# Altium PCB IR2101+irfz44.PcbDoc
Units mm, origin at the board's own origin, x right, y up, seen from the top; angles counter-clockwise.
Board outline 66.04 x 105.41 mm, 2 copper layers (Top Layer, Bottom Layer); 55 components, 31 nets, 156 pads, 33 vias.
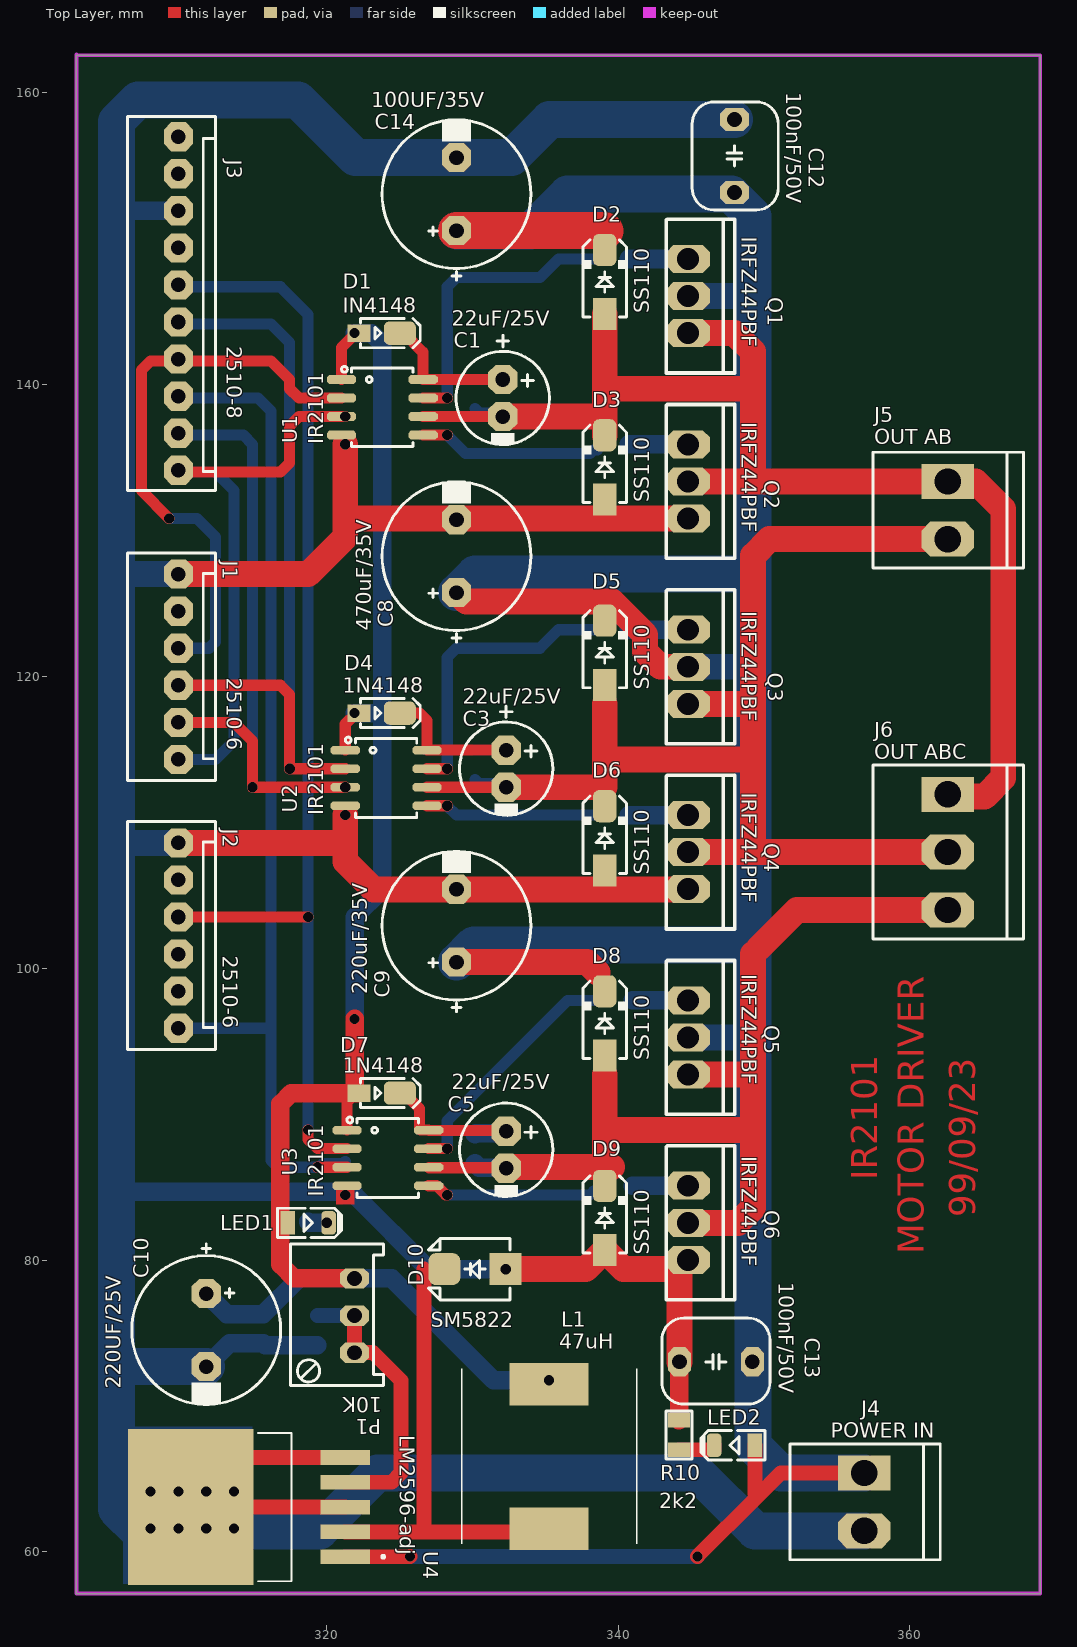
[diagram p0: Top Layer view]
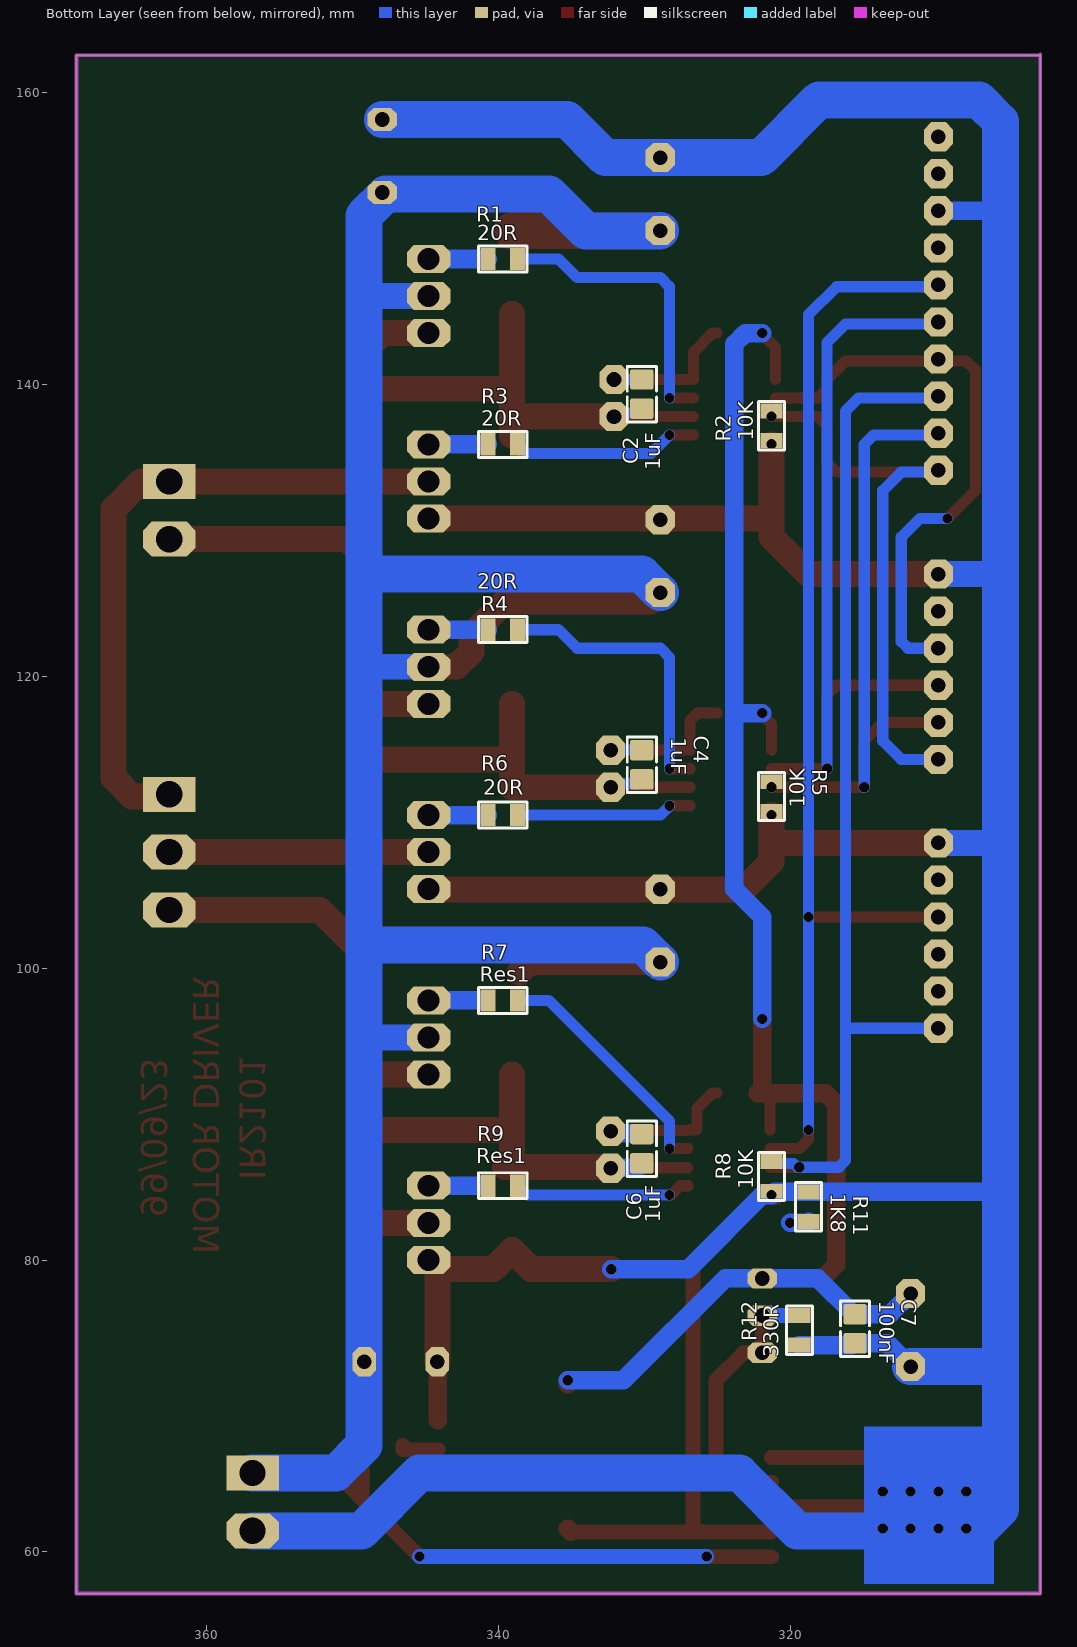
[diagram p1: Bottom Layer view, seen from below]
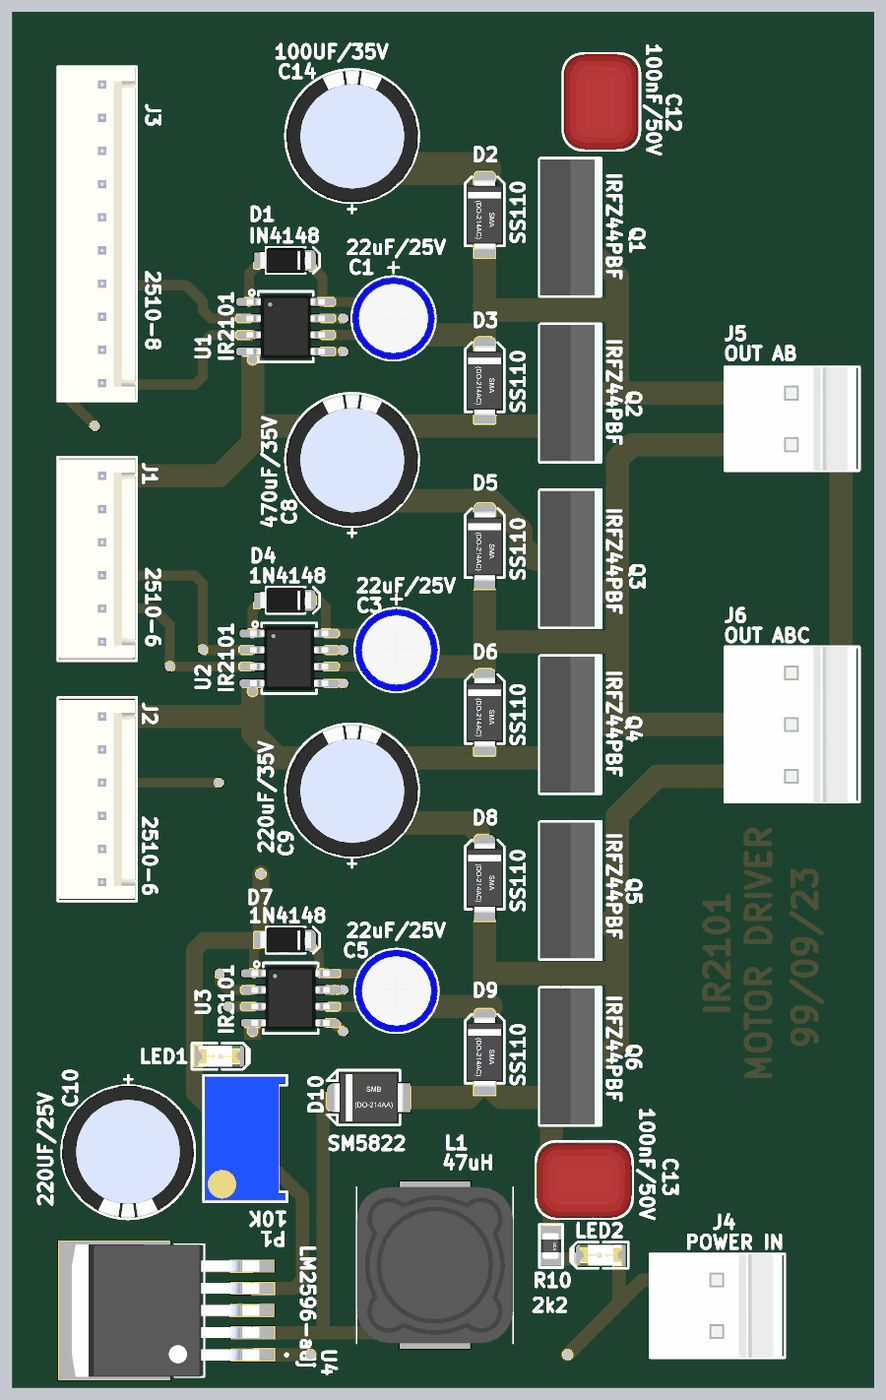
[diagram p2: 3D render of the assembled board from above, using the file's embedded part models]
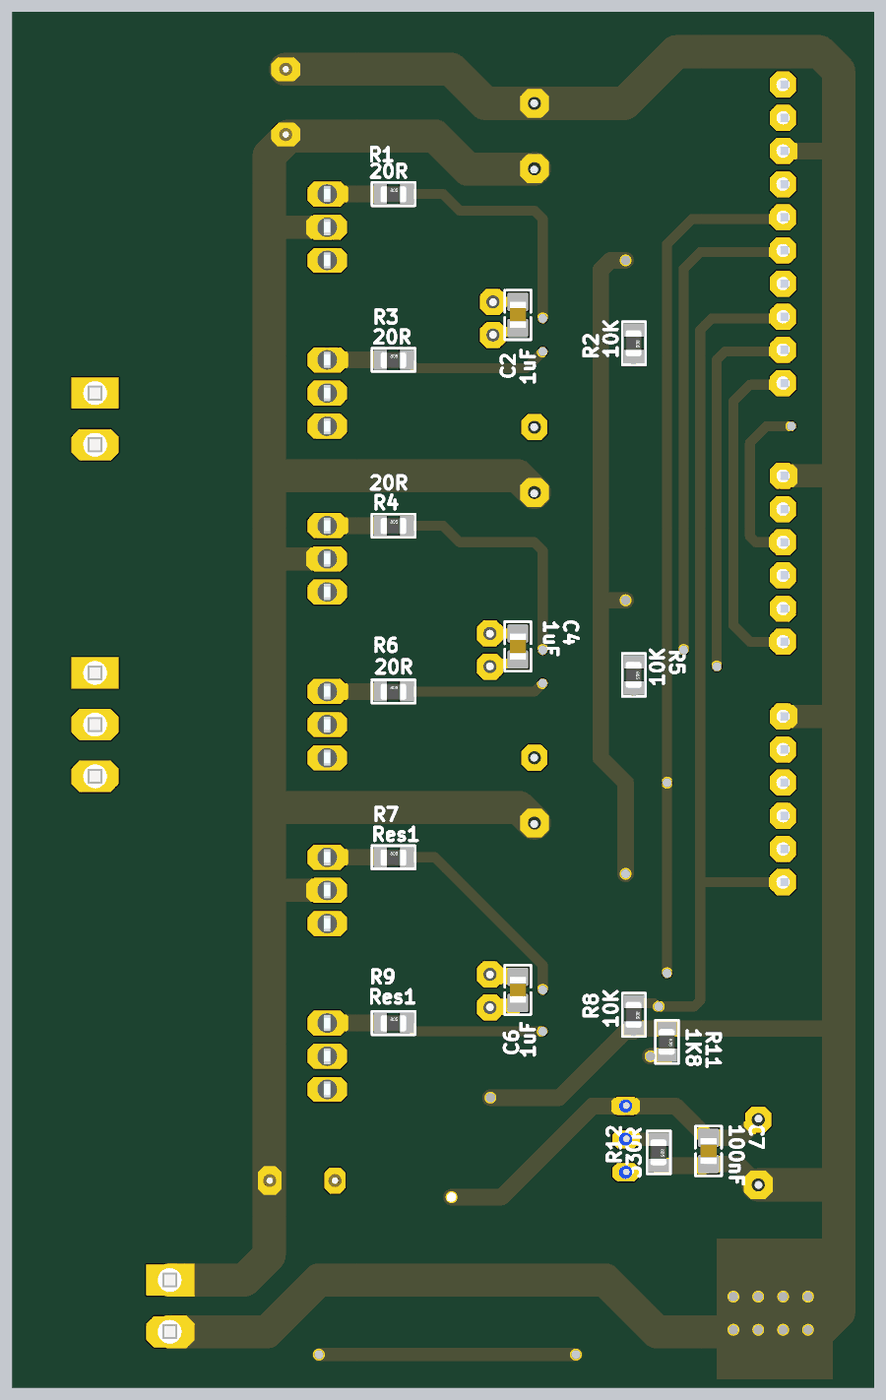
[diagram p3: 3D render of the assembled board from below, using the file's embedded part models]

## Layer stack, top to bottom
Top Solder: solder mask 0.0102, Solder Resist, Dk 3.5
Top Layer: signal copper 0.0356
Dielectric 1: dielectric 0.32, FR-4, Dk 4.8
Bottom Layer: signal copper 0.0356
Bottom Solder: solder mask 0.0102, Solder Resist, Dk 3.5

## Board outline
302.895,57.15 302.895,162.56 368.935,162.56 368.935,57.15

## Design rules (kind name [scope] priority, off if disabled: settings)
Clearance [All] p1: gap=0.254 ignorepadtopadclearanceinfootprint=FALSE except(0: Arc-Hole Track-Hole SMDPad-Hole THPad-Hole Via-Hole Fill-Hole Poly-Hole Region-Hole Text-Hole)
PolygonConnect [All] p1: connectstyle=Relief reliefconductorwidth=0.254 reliefentries=4 polygonreliefangle="90 Angle" airgapwidth=0.254
RoutingVias [All] p1: holewidth=0.711 width=1.27 viastyle="Through Hole" minholewidth=0.711 minwidth=1.27 maxholewidth=0.711 maxwidth=1.27
SolderMaskExpansion [All] p1: expansion=0.102 istentingtop=FALSE
Width [All] p1: maxlimit=2.54 minlimit=0.508 preferedwidth=1.27 minimp=50.000000 maximp=50.000000 favimp=50.000000
30 further rules are at their usual default settings.

## Components (designator, comment, footprint, x,y, rotation, side; value= is the part's Value field where it differs from the comment)
C1 "22uF/25V" C_EL_6X11 332.105,139.065 r270 top value=22uF
C2 "1uF" C0805E 330.2,139.335 r270 bottom
C3 "22uF/25V" C_EL_6X11 332.336,113.665 r270 top value=22uF
C4 "1uF" C0805E 330.2,113.935 r270 bottom
C5 "22uF/25V" C_EL_6X11 332.336,87.554 r270 top value=22uF
C6 "1uF" C0805E 330.2,87.63 r270 bottom
C7 "100nF" C0805E 315.595,75.295 r90 bottom
C8 "470uF/35V" C_EL_10X12 328.93,128.23 r90 top
C9 "220uF/35V" C_EL_10X12 328.93,102.91 r90 top
C10 "220UF/25V" C_EL_10X12 311.785,75.196 r270 top
C12 "100nF/50V" C_PLY_7X6 347.98,155.649 r270 top
C13 "100nF/50V" C_PLY_7X6 346.71,73.025 r0 top value=10nF
C14 "100UF/35V" C_EL_10X12 328.93,153.035 r90 top
D1 "IN4148" D_SOD123W 323.85,143.51 r0 top value=?
D2 "SS110" D_SMA 339.09,147.01 r90 top value=?
D3 "SS110" D_SMA 339.09,134.31 r90 top value=?
D4 "1N4148" D_SOD123W 323.85,117.475 r0 top value=?
D5 "SS110" D_SMA 339.09,121.61 r90 top value=?
D6 "SS110" D_SMA 339.09,108.895 r90 top value=?
D7 "1N4148" D_SOD123W 323.85,91.44 r0 top value=?
D8 "SS110" D_SMA 339.09,96.21 r90 top value=?
D9 "SS110" D_SMA 339.09,82.875 r90 top value=?
D10 "SM5822" D_SMB 330.2,79.375 r180 top value=?
J1 "2510-6" 6p-2510 309.88,120.65 r90 top value="INPUT AB"
J2 "2510-6" 6p-2510 309.88,102.235 r90 top value="INPUT C"
J3 "2510-8" 10p-2510 309.88,145.542 r90 top value="INPUT ABC"
J4 "POWER IN" CH-02 356.87,63.425 r270 top
J5 "OUT AB" CH-02 362.585,131.37 r270 top
J6 "OUT ABC" CH-03 362.585,107.95 r270 top
L1 "47uH" CDRH127LDNP560MC-12*12 335.28,61.595 r0 top
LED1 "LED3mm" LED1206RED 318.77,82.55 r0 top
LED2 "LED3mm" LED1206RED 347.98,67.31 r180 top
P1 "10K" POT_3296W 321.945,76.196 r90 top
Q1 "IRFZ44PBF" TO-254 344.805,148.59 r270 top
Q2 "IRFZ44PBF" TO-254 344.805,135.89 r270 top
Q3 "IRFZ44PBF" TO-254 344.805,123.19 r270 top
Q4 "IRFZ44PBF" TO-254 344.805,110.49 r270 top
Q5 "IRFZ44PBF" TO-254 344.805,97.79 r270 top
Q6 "IRFZ44PBF" TO-254 344.805,85.09 r270 top
R1 "20R" R0805 339.725,148.59 r270 bottom
R2 "10K" R0805 321.31,137.16 r0 bottom
R3 "20R" R0805 339.725,135.89 r270 bottom
R4 "20R" R0805 339.725,123.19 r270 bottom
R5 "10K" R0805 321.31,111.76 r0 bottom
R6 "20R" R0805 339.725,110.49 r270 bottom
R7 "Res1" R0805 339.725,97.79 r270 bottom value=20R
R8 "10K" R0805 321.31,85.725 r0 bottom
R9 "Res1" R0805 339.725,85.09 r270 bottom value=20R
R10 "2k2" R0805 344.17,68.018 r180 top
R11 "1K8" R0805 318.77,83.65 r0 bottom
R12 "330R" R0805 319.405,75.184 r0 bottom
U1 "IR2101" SO_8 323.85,138.43 r0 top
U2 "IR2101" SO_8 324.11,113.03 r0 top
U3 "IR2101" SO_8 324.225,86.995 r0 top
U4 "LM2596-adj" "to-263-5 5d2pak LM2596S" 310.71,63.07 r180 top

## Footprints (in the part's own frame and the unit in brackets; to place one, negate y for a bottom-side part, rotate by r counter-clockwise, add the part's x,y. Pads: shape width x height; smd on the part's side, far side on the other; paste and mask are expansions set on the pad)
6p-2510 [mm] "DS1070  WF, Cvilux CI31 pitch 2.54mm"
  oct 2x2 hole 1: 1(-6.35,0) 2(-3.81,0) 3(-1.27,0) 4(1.27,0) 5(3.81,0) 6(6.35,0)
  silkscreen extent -7.8,-2.55 7.8,3.5, body extent -7.62,-2.4 7.62,3.4, height 11.56
10p-2510 [mm] "DS1070  WF, Cvilux CI31 pitch 2.54mm"
  oct 2x2 hole 1: 1(-11.43,0) 2(-8.89,0) 3(-6.35,0) 4(-3.81,0) 5(-1.27,0) 6(1.27,0) 7(3.81,0) 8(6.35,0) 9(8.89,0) 10(11.43,0)
  silkscreen extent -12.8,-2.55 12.8,3.5, body extent -12.7,-2.4 12.7,3.4, height 11.56
C0805E [mm] "CHIP Capacitor, 2.0X1.3mm, 0805, EXPANDED PAD"
  rrect20% 1.4x1.6 smd mask+0.1: 1(-1,0) 2(1,0)
  Top Layer pour cut-out: -0.5,0.8 0.5,0.8 0.5,-0.8 -0.5,-0.8
  silkscreen extent -1.9,-1 1.9,1, body extent -1,-0.63 1,0.62, height 1
C_EL_6X11 [mm] "Cap Elec, D6.3X11.0H pitch: 2.5mm"
  oct 2x2 hole 1: 1(-1.27,0) 2(1.27,0)
  silkscreen extent -4.3,-3.2 3.2,3.2, body extent -3.17,-3.18 3.18,3.18, height 2.51
C_EL_10X12 [mm] "Cap Elec, D10.0X12.0H pitch: 5.0mm"
  oct 2x2 hole 1: 1(-2.5,0) 2(2.5,0)
  silkscreen extent -5.9,-5.1 5.1,5.1, body extent -5.07,-5.08 5.05,5.04, height 13.7
C_PLY_7X6 [mm] "CAP, POLYESTER, 7.0X6.0mm pitch: 5.0mm"
  oct 1.6x2 hole 1: 1(-2.5,0) 2(2.5,0)
  silkscreen extent -3.7,-2.9 3.7,3, body extent -3.65,-2.85 3.65,2.85, height 8.3
CDRH127LDNP560MC-12*12 [mm]
  rect 5.4x2.9 smd: 1(0,0) 2(0,9.9)
  silkscreen extent -6,-1.05 6,10.95, body extent -6,-1.05 6,10.95, height 7.8
CH-02 [mm] "Connector; Header; 2 Position"
  rect 2.4x3.6 hole 1.8: 1(-1.98,0)
  oct 2.4x3.6 hole 1.8: 2(1.98,0)
  silkscreen extent -3.98,-5.1 3.96,5.21, body extent -3.96,-5 3.96,5, height 13.5
CH-03 [mm] "Connector; Header; 3 Position"
  rect 2.4x3.6 hole 1.8: 1(-3.96,0)
  oct 2.4x3.6 hole 1.8: 2(0,0) 3(3.96,0)
  silkscreen extent -5.96,-5.1 5.94,5.21, body extent -5.94,-5 5.94,5, height 13.5
D_SMA [mm] "SMA Molded Diode, 2-Leads, Body 4.3x2.7mm, SOD-128"
  rect 2.2x1.6 smd: 1(-2.2,0)
  rrect50% 2.2x1.6 smd: 2(2.2,0)
  silkscreen extent -2.4,-1.5 2.9,1.5, body extent -2.75,-1.4 2.75,1.4, height 2.6
D_SMB [mm] "SMB Molded Diode, 2-Leads, Body 4.3x3.5mm"
  rect 2.2x2.2 smd: 1(-2.1,0)
  rrect50% 2.2x2.2 smd: 2(2.1,0)
  Top Layer pour cut-out: -1.524,2.1 -1.524,-2.1 1.524,-2.1 1.524,2.1
  silkscreen extent -2.4,-2.1 3.2,2.1, body extent -2.75,-1.95 2.75,1.95, height 2.45
D_SOD123W [mm] "PowerDI-123, SOD123, DO-213AA, 1206D"
  rect 1.6x1.2 smd mask+0.1: 1(-1.6,0)
  rrect50% 2.2x1.6 smd mask+0.1: 2(1.2,0)
  Top Layer pour cut-out: -1.016,1.1 -1.016,-1.1 1.016,-1.1 1.016,1.1
  silkscreen extent -1.5,-1 2.6,1, body extent -1.95,-0.97 1.95,0.96, height 1
LED1206RED [mm] "LED, 1206, RED"
  rect 1x1.6 smd mask+0.075: 1(-1.4,0)
  rrect50% 1x1.6 smd mask+0.075: 2(1.4,0)
  Top Layer pour cut-out: -1.1,1.1 -1.1,-1.1 1.1,-1.1 1.1,1.1
  silkscreen extent -2.1,-1 2.3,1, body extent -1.6,-0.8 1.6,0.8, height 0.68
POT_3296W [mm] "POT, TRIM, 10.0X5.0mm, pitch: 2.5mm 3299W 3296W S64W"
  oct 1.4x2 hole 1: 1(-2.54,0) 2(0,0) 3(2.54,0)
  silkscreen extent -4.8,-2 4.9,4.4, body extent -4.73,-1.85 4.8,4.25, height 11.56
R0805 [mil]
  rect 60x40 smd: 1(0,40) 2(0,-40)
  silkscreen extent -35,-65 35,65, body extent -24,-39 26,39, height 31
SO_8 [mm] "SOP-8, 5x3.9mm body 1.27mm pitch, SOT96-1, M08A, S8, SOIC8, VO8, MS-012AA(JEDEC), R-8, 8S2, VOG8"
  oct 2x0.6 smd: 1(-2.8,1.905) 2(-2.8,0.635) 3(-2.8,-0.635) 4(-2.8,-1.905) 5(2.8,-1.905) 6(2.8,-0.635) 7(2.8,0.635) 8(2.8,1.905)
  silkscreen extent -2.8,-2.7 2.1,2.8, body extent -3,-2.45 3,2.45, height 1.7
TO-254 [mm]
  oct 1.92x3 hole 1.5: 1(0,0) 2(2.54,0) 3(5.08,0)
  silkscreen extent -2.73,-1.5 7.81,3.19, body extent -2.67,-1.5 7.75,3.19, height 18.84
"to-263-5 5d2pak LM2596S" [mm]
  rect 3.4x1 smd paste-3 mask+0: 1(-10.6,3.4) 2(-10.6,1.7) 3(-10.6,0) 4(-10.6,-1.7) 5(-10.6,-3.4)
  rect 8.6x10.7 smd paste-6 mask+0: 6(0,0)
  silkscreen extent -13.3,-5.08 -4.62,5.08, body extent -11.11,-5.08 3.24,5.08, height 4.65

## Part data
C1 C3 C5: library part "Cap Pol1", "Polarized Capacitor (Radial)", LatestRevisionDate=17-Jul-2002, LatestRevisionNote="Re-released for DXP Platform.", PackageDescription="Polarized Capacitor (Radial); 2 Leads", PackageReference=RB7.6-15, Published=8-Jun-2000, Publisher="Altium Limited"
C2 C4 C6: library part Cap, "Capacitor", LatestRevisionDate=17-Jul-2002, LatestRevisionNote="Re-released for DXP Platform.", PackageDescription="Radial Cap, Thru-Hole; 2 Leads; 0.3 in Pin Spacing", PackageReference=RAD-0.3, Published=8-Jun-2000, Publisher="Altium Limited"
C7: library part C
C8 C9: library part "Cap 220uF", "63VDC"
C10 C14: library part CAP_ELECTRO_POLIMER
C12: library part "Cap 100nF"
C13: library part Cap, "63VDC", LatestRevisionDate=17-Jul-2002, LatestRevisionNote="Re-released for DXP Platform.", PackageDescription="Radial Cap, Thru-Hole; 2 Leads; 0.3 in Pin Spacing", PackageReference=RAD-0.3, Published=8-Jun-2000, Publisher="Altium Limited"
D1 D4 D7: library part DIODE, "DIODE, GENERAL PURPOSE, 50V/1A", ASSEMBLY=ASSEMBLY, DESC=DESCRIPTION, MANF=MANF, MANF_P#=1N4001, PARAM=50V, PARAM2=1A, Price=PRICE
D2 D3 D5 D6 D8 D9 D10: library part SCHOTTKY, "DIODE, SCHOTTKY, 40V, 1A", ASSEMBLY=ASSEMBLY, DESC=DESCRIPTION, MANF=DIODES, MANF_P#=1N5819HW-7-F, PARAM=40V, PARAM2=1A, Price=PRICE
J1 J2: library part HDRWF_6, "Header, WF, Pitch: 2.54mm"
J3: library part HDRWF_8, "Header, WF, Pitch: 2.54mm", DESC="INPUT ABC"
J4 J5: library part "sip 2", "CH-02 ST pitch 3.96mm, Single Row, Vertical, 2pin", Contact Resistance=20mOhm, Operating Temperature="-40 to +105degC", Part Number=61300211121, Rated Current=3A, Withstanding Voltage=500VAC, Working Voltage=250VAC, ComponentLink1Description=Manufacturer, ComponentLink1URL=http://www.we-online.de, ComponentLink2Description=Datasheet, ComponentLink2URL=https://katalog.we-online.de/em/datasheet/6130xx11121.pdf, Gender=Male, Mounting Technology=THT, Orientation=Vertical, Packaging="3.96mm CH-02 ST", Pitch=3.96mm, Published Date="June 2019", Publisher="Wurth Elektronik", Row Number=Single
  J4: Pin Number=2
J6: library part "sip 3", "CH-02 STpitch 3.96mm, Single Row, Vertical, 3pin", Contact Resistance=20mOhm, Operating Temperature="-40 to +105degC", Part Number=61300311121, Rated Current=3A, Withstanding Voltage=500VAC, Working Voltage=250VAC, ComponentLink1Description=Manufacturer, ComponentLink1URL=http://www.we-online.de, ComponentLink2Description=Datasheet, ComponentLink2URL=https://katalog.we-online.de/em/datasheet/6130xx11121.pdf, Gender=Male, Mounting Technology=THT, Orientation=Vertical, Packaging="3.96mm CH-02 ST", Pin Number=3, Pitch=1, Published Date="June 2019", Publisher="Wurth Elektronik", Row Number=Single
L1: library part CDRH127_LDNP-560MC, "Inductor", Arrow Part Number=CDRH127/LDNP-560MC, Manufacturer_Name=Sumida, Mouser Part Number=851-CDRH127LDNP560MC, Arrow Price/Stock=https://www.arrow.com/en/products/cdrh127ldnp-560mc/sumida, Datasheet Link=https://www.arrow.com/en/products/cdrh127ldnp-560mc/sumida, Height=8mm, Manufacturer_Part_Number=CDRH127/LDNP-560MC, Mouser Price/Stock=https://www.mouser.co.uk/ProductDetail/Sumida/CDRH127-LDNP-560MC?qs=IXCoV6m%252B579ap3iATSRauQ%3D%3D
P1: library part Multi-Turn, "Potentiometer"
Q1 Q2 Q3 Q4 Q5 Q6: "MOSFET (N-Channel)", Manufacturer_Name=Vishay, Mouser Part Number=844-IRFZ44PBF, Arrow Part Number=IRFZ44PBF, Arrow Price/Stock=https://www.arrow.com/en/products/irfz44pbf/vishay, Datasheet Link=https://www.vishay.com/docs/91291/91291.pdf, Height=4.65mm, Manufacturer_Part_Number=IRFZ44PBF, Mouser Price/Stock=https://www.mouser.co.uk/ProductDetail/Vishay-Semiconductors/IRFZ44PBF?qs=%2FRKvNCQzLu0R%252BpFoqVUQ5w%3D%3D
R1 R2 R3 R4 R5 R6 R8 R12: library part Res1, "Resistor", LatestRevisionDate=17-Jul-2002, LatestRevisionNote="Re-released for DXP Platform.", PackageDescription="Axial Device, Thru-Hole; 2 Leads; 0.3 in Pin Spacing", PackageReference=AXIAL-0.3, Published=8-Jun-2000, Publisher="Altium Limited"
R7 R9: "Resistor", LatestRevisionDate=17-Jul-2002, LatestRevisionNote="Re-released for DXP Platform.", PackageDescription="Axial Device, Thru-Hole; 2 Leads; 0.3 in Pin Spacing", PackageReference=AXIAL-0.3, Published=8-Jun-2000, Publisher="Altium Limited"
R10 R11: library part R
U1 U2 U3: "High and Low Side Driver", Code_JEDEC=MO-001-AN, ComponentLink1Description="Manufacturer Link", ComponentLink1URL=http://www.irf.com/, DatasheetVersion=PD60043J, LatestRevisionDate=04-Mar-2005, LatestRevisionNote="Stylized 3D Model Added.", PackageDescription="DIP; 8 Leads; Row Spacing 7.62 mm; Pitch 2.54 mm", PackageReference=PDIP8, Published=8-Jun-2000, Publisher="Altium Limited"
U4: library part LM2596s

## Via types
v1: diameter 0.7, hole 0.7, Top Layer to Bottom Layer, 33 vias

## Nets (pads, with @x,y where several pads share a name; then routed paths per layer and width w, separated by ;. In a path a pad name is that pad's centre, name@x,y a point inside that pad or via, vN(x,y) a via of type N, cw(c..) or ccw(c..) an arc to the next point about the centre after c; other vN are vias at no path point)
15V: C7.2 C10.1 D1.1 D4.1 D7.1 L1.2 LED1.1 P1.3 U1.1 U2.1 U3.1 | length 115.7
  Top Layer w0.762: U1.1 321.05,142.51 321.945,143.405 v1(321.945,143.51) ; U2.1 321.31,116.735 D4.1@321.997,117.422 ; U3.1 321.425,90.815 D7.1@322.05,91.44
  Top Layer w1.27: P1.3 317.822,78.736 316.865,79.692 316.865,82.55 316.865,90.696 317.609,91.44 321.425,91.44 D7.1@322.05,91.44 ; v1(321.945,96.52) 321.945,91.745 D7.1 ; L1.2 v1(335.28,71.755)
  Bottom Layer w1.27: C10.1 313.186,76.295 C7.2 315.695,76.295 318.136,78.736 324.489,78.736 331.47,71.755 v1(335.28,71.755) ; v1(321.945,96.52) 321.945,103.505 323.85,105.41 323.85,117.475 ; v1(321.945,117.475) 323.85,117.475 ; v1(321.945,143.51) 323.106,143.51 323.85,142.766 323.85,117.475
24V: C8.1 C9.1 C12.2 C13.2 C14.1 D2.2 D5.2 D8.2 J4.1 LED2.1 Q1.2 Q3.2 Q5.2 U4.1 | length 249.9
  Top Layer w1.016: U4.1 325.735,59.67 v1(325.755,59.69) ; v1(345.44,59.69) 349.567,63.817 ; LED2.1 349.38,64.005 349.567,63.817 ; J4.1 351.155,65.405 349.567,63.817
  Top Layer w1.778: C9.1 337.89,100.41 338.59,99.71 ; C8.1 328.99,125.73 329.61,125.11 339.09,125.11 339.59,125.11 341.858,122.842 341.858,121.692 342.9,120.65 Q3.2
  Top Layer w2.54: C14.1 339.065,150.535 339.09,150.51
  Bottom Layer w1.016: v1(325.755,59.69) v1(345.44,59.69)
  Bottom Layer w1.778: Q5.2 349.25,95.25 ; Q3.2 349.25,120.65 ; Q1.2 349.25,146.05
  Bottom Layer w2.54: C9.1 330.12,101.6 349.25,101.6 ; C8.1 330.2,127 349.25,127 ; C14.1 328.97,150.495 334.01,150.495 336.55,153.035 347.762,153.035 349.25,151.547 349.25,146.05 349.25,127 ; J4.1 351.155,65.405 349.25,67.31 349.25,95.25 349.25,101.6 ; 349.25,101.6 349.25,120.65 349.25,127
GND: C7.1 C8.2 C9.2 C10.2 C12.1 C13.1 C14.2 D3.1 D6.1 D9.1 D10.1 J1.6 J2.6 J3.8 J4.2 Q2.3 Q4.3 Q6.3 R2.1 R5.1 R8.1 R10.2 R11.2 R12.1 U1.4 U2.4 U3.4 U4.3 U4.5 U4.6 | length 382.2
  Top Layer w1.016: U4.6 U4.3 ; U4.6@314.11,66.47 U4.5
  Top Layer w1.27: U4.6 U4.6@314.11,66.47 ; R10.2 344.19,69.054 344.19,73.005 C13.1
  Top Layer w1.778: J2.6 321.31,108.585 ; J1.6 318.77,127 321.31,129.54 321.31,130.81 ; v1(321.31,110.49) 321.31,108.585 ; v1(321.31,135.89) 321.31,130.81 ; v1(332.3,79.375) 337.79,79.375 D9.1 340.39,79.375 344.132,79.375 344.767,80.01 Q6.3 344.805,79.972 344.21,79.377 C13.1 ; Q4.3 344.797,105.402 339.098,105.402 339.09,105.395 323.23,105.395 321.31,107.315 321.31,108.585 ; Q2.3 321.31,130.81
  Bottom Layer w1.27: 305.622,84.455 305.833,84.666 R11.2 321.099,84.666 v1(321.31,84.455) 321.945,84.455 327.025,79.375 v1(332.3,79.375) ; 305.622,151.638 305.876,151.892 J3.8 ; C10.2 313.384,74.295 C7.1 315.695,74.295 315.822,74.168 R12.1
  Bottom Layer w1.778: 305.435,108.585 305.622,108.585 J2.6 ; 305.435,127 305.622,127 J1.6
  Bottom Layer w2.54: 306.07,72.696 C10.2 ; v1(307.975,61.595) 307.26,61.595 307.11,61.445 ; v1(309.88,61.595) v1@309.88,61.445 ; C12.1 335.314,158.149 332.7,155.535 C14.2 322.026,155.535 318.065,159.496 307.11,159.496 305.622,158.008 305.622,151.638 305.622,127 305.622,108.585 305.622,84.455 305.622,62.933 307.11,61.445 ; J4.2 349.4,61.445 345.44,65.405 323.51,65.405 319.55,61.445 v1@309.88,61.445 ; 307.11,61.445 v1@309.88,61.445
  other v1: 311.785,61.595 313.69,61.595 307.975,64.135 309.88,64.135 311.785,64.135 313.69,64.135
Motor-A: C1.2 C2.2 D2.1 D3.2 J5.1 J6.1 Q1.3 Q2.2 U1.6 | length 96.5
  Top Layer w0.762: U1.6 C1.2
  Top Layer w1.778: C1.2 332.113,137.803 339.082,137.803 339.09,137.81 ; D3.2 339.09,137.81 ; D2.1 339.09,139.7 ; Q1.3 347.98,143.51 349.25,142.24 349.25,139.7 ; J6.1 362.735,111.76 365.125,111.76 366.395,113.03 366.395,131.445 364.49,133.35 J5.1 Q2.2 349.25,133.35 349.25,139.7 ; 339.09,137.81 339.09,139.7 ; 339.09,139.7 349.25,139.7
  Bottom Layer w0.762: C2.2 330.503,138.032 331.868,138.032 C1.2
Motor-B: C3.2 C4.2 D5.1 D6.2 J5.2 J6.2 Q3.3 Q4.2 U2.6 | length 86.6
  Top Layer w0.762: U2.6 C3.2
  Top Layer w1.778: C3.2 339.09,112.395 339.09,114.3 ; 339.09,118.11 339.09,114.3 ; Q4.2 349.25,107.95 ; Q3.3 349.25,118.11 ; 350.37,129.39 349.25,128.27 349.25,118.11 ; 350.52,129.39 J5.2 ; J6.2 349.25,107.95 ; 339.09,114.3 349.25,114.3 ; 349.25,107.95 349.25,114.3 ; 349.25,114.3 349.25,118.11
  Bottom Layer w0.762: C4.2 330.503,112.632 332.099,112.632 C3.2
Motor-C: C5.2 C6.2 D8.1 D9.2 J6.3 Q5.3 Q6.2 U3.6 | length 71.8
  Top Layer w0.762: U3.6@327.063,86.322 C5.2@332.298,86.322
  Top Layer w1.778: C5.2 332.378,86.327 332.535,86.327 332.569,86.36 338.765,86.36 339.09,86.685 339.09,88.9 ; 339.09,86.375 339.59,86.375 ; 339.09,92.71 339.09,88.9 ; Q6.2 348.208,82.55 349.25,83.592 349.25,88.9 ; Q5.3 349.25,92.71 ; 349.25,100.965 349.25,92.71 ; 349.672,101.387 352.275,103.99 J6.3 ; 339.09,88.9 349.25,88.9 ; 349.25,88.9 349.25,92.71
  Bottom Layer w1.27: C6.2 330.503,86.327 C5.2@332.336,86.327
Motor-Direct1: J1.1 J3.1 R2.2 U1.3 | length 40.4
  Top Layer w0.762: J3.1 309.943,134.112 310.07,133.985 316.865,133.985 317.5,134.62 317.5,137.16 318.135,137.795 U1.3 v1(321.31,137.795)
  Bottom Layer w0.762: J1.1 312.42,114.3 313.69,115.57 313.69,132.715 312.42,133.985 310.07,133.985 309.943,134.112 J3.1
Motor-Direct2: J1.2 J3.2 R5.2 U2.3 | length 44
  Top Layer w0.762: J1.2 313.69,116.84 314.96,115.57 v1(314.96,112.395) v1(321.31,112.395)
  Bottom Layer w0.762: J3.2 309.943,136.652 310.07,136.525 314.325,136.525 314.96,135.89 v1(314.96,112.395)
Motor-Direct3: J2.1 J3.3 R8.2 U3.3 | length 71.9
  Top Layer w0.762: v1(319.405,86.36) U3.3
  Bottom Layer w0.762: J2.1 316.23,95.885 ; J3.3 309.943,139.192 310.07,139.065 315.341,139.065 316.23,138.176 316.23,95.885 ; R8.2 321.183,86.614 319.796,86.614 319.542,86.36 v1(319.405,86.36) 316.676,86.36 316.23,86.806 316.23,95.885
NetC1_1: C1.1 C2.1 D1.2 U1.8 | length 11.4
  Top Layer w0.762: D1.2 325.34,143.51 326.65,142.2 U1.8 C1.1
  Bottom Layer w0.762: C2.1 C1.1
NetC3_1: C3.1 C4.1 D4.2 U2.8 | length 11.7
  Top Layer w0.762: D4.2 326.39,117.475 326.91,116.955 U2.8 C3.1
  Bottom Layer w0.762: C4.1 C3.1
NetC5_1: C5.1 C6.1 D7.2 U3.8 | length 11.3
  Top Layer w0.762: D7.2 325.34,91.44 326.406,90.374 326.406,88.981 326.487,88.9 U3.8 ; U3.8@327.063,88.862 332.298,88.862 C5.1@332.336,88.9
  Bottom Layer w1.27: C6.1 330.265,88.695 C5.1@332.336,88.695
NetD10_2: D10.2 L1.1 U4.2 | length 32.2
  Top Layer w1.016: U4.2 327.025,61.37 ; 326.7,79.375 326.7,61.695 327.025,61.37 ; L1.1@335.055,61.37 327.025,61.37
  Top Layer w1.27: L1.1@335.055,61.37 L1.1
NetLED1_2: LED1.2 R11.1 | length 1.3
  Bottom Layer w1.27: R11.1 318.854,82.55 v1(320.04,82.55)
NetLED2_2: LED2.2 R10.1 | length 2.7
  Top Layer w1.016: R10.1 346.556,67.002 346.58,67.026 LED2.2
NetP1_1: P1.1 P1.2 R12.2 U4.4 | length 19.5
  Top Layer w1.016: U4.4 324.485,64.77 325.12,65.405 325.12,71.755 323.219,73.656 P1.1 P1.2
  Bottom Layer w1.016: R12.2 319.659,76.2 319.663,76.196 P1.2
NetQ1_1: Q1.1 R1.2 | length 4.1
  Bottom Layer w1.27: R1.2 Q1.1
NetQ2_1: Q2.1 R3.2 | length 4.1
  Bottom Layer w1.27: R3.2 Q2.1
NetQ3_1: Q3.1 R4.2 | length 4.1
  Bottom Layer w1.27: R4.2 Q3.1
NetQ4_1: Q4.1 R6.2 | length 4.1
  Bottom Layer w1.27: R6.2 Q4.1
NetQ5_1: Q5.1 R7.2 | length 3.8
  Bottom Layer w1.27: R7.2@340.995,97.79 Q5.1
NetQ6_1: Q6.1 R9.2 | length 3.8
  Bottom Layer w1.27: R9.2@340.995,85.09 Q6.1
NetR1_1: R1.1 U1.7 | length 20.5
  Top Layer w0.762: U1.7 v1(328.295,139.065)
  Bottom Layer w0.762: v1(328.295,139.065) 328.295,146.685 328.93,147.32 334.645,147.32 335.915,148.59 R1.1
NetR3_1: R3.1 U1.5 | length 13
  Top Layer w0.762: U1.5 v1(328.295,136.525)
  Bottom Layer w0.762: v1(328.295,136.525) 329.565,135.255 338.074,135.255 338.328,135.509 338.582,135.509 338.709,135.636 R3.1
NetR4_1: R4.1 U2.7 | length 20.2
  Top Layer w0.762: U2.7 v1(328.295,113.665)
  Bottom Layer w0.762: v1(328.295,113.665) 328.295,121.285 328.93,121.92 334.645,121.92 335.915,123.19 R4.1
NetR6_1: R6.1 U2.5 | length 12.1
  Top Layer w0.762: U2.5 v1(328.295,111.125)
  Bottom Layer w0.762: v1(328.295,111.125) 328.93,110.49 R6.1
NetR7_1: R7.1 U3.7 | length 17
  Top Layer w0.762: U3.7 v1(328.295,87.63)
  Bottom Layer w0.762: v1(328.295,87.63) 328.295,89.535 336.55,97.79 R7.1
NetR9_1: R9.1 U3.5 | length 12.4
  Top Layer w0.762: U3.5 327.563,85.09 328.198,84.455 v1(328.295,84.455)
  Bottom Layer w0.762: v1(328.295,84.455) 338.074,84.455 338.328,84.709 338.582,84.709 338.709,84.836 R9.1
PWMA: J1.4 J3.4 U1.2 | length 40.1
  Top Layer w0.762: v1(309.245,130.81) 307.34,132.715 307.34,139.7 307.34,140.97 307.975,141.605 309.753,141.605 J3.4 309.943,141.732 310.07,141.605 316.23,141.605 317.5,140.335 317.5,139.7 318.135,139.065 U1.2
  Bottom Layer w0.762: v1(309.245,130.81) 311.15,130.81 312.42,129.54 312.42,122.366 311.974,121.92 J1.4
PWMB: J1.3 J3.5 U2.2 | length 54.2
  Top Layer w0.762: J1.3 316.865,119.38 317.5,118.745 v1(317.5,113.665) U2.2
  Bottom Layer w0.762: J3.5 309.943,144.272 310.07,144.145 316.23,144.145 317.5,142.875 v1(317.5,113.665)
PWMC: J2.4 J3.6 U3.2 | length 78.1
  Top Layer w0.762: J2.4 v1(318.77,103.505) ; v1(318.77,88.9) 318.77,88.265 319.405,87.63 U3.2
  Bottom Layer w0.762: J3.6 309.943,146.812 310.07,146.685 316.865,146.685 318.77,144.78 v1(318.77,103.505) v1(318.77,88.9)
pads on no net: J1.5 J2.2 J2.3 J2.5 J3.7 J3.9 J3.10

## Keep-outs
Keep-Out Layer:
  lines w0.254: 302.895,162.56 368.935,162.56 368.935,57.15 302.895,57.15 302.895,162.603

## Other copper
Top Layer:
  rectangle net GND: 320.675,83.82 321.945,85.09
  text "IR2101" at 357.759,85.471 h1.78 r90
  text "99/09/23" at 364.49,82.931 h1.78 r90
  text "MOTOR DRIVER" at 360.934,80.391 h1.78 r90
Bottom Layer:
  rectangle net GND: 306.07,57.785 314.96,68.58